# Altium PCB FT230.PcbDoc
Units mil, origin at the board's own origin, x right, y up, seen from the top; angles counter-clockwise.
Board outline not stored, 4 copper layers (Top Layer, Internal Plane 2, Internal Plane 1, Bottom Layer); 9 components, 0 nets, 43 pads, 14 vias.
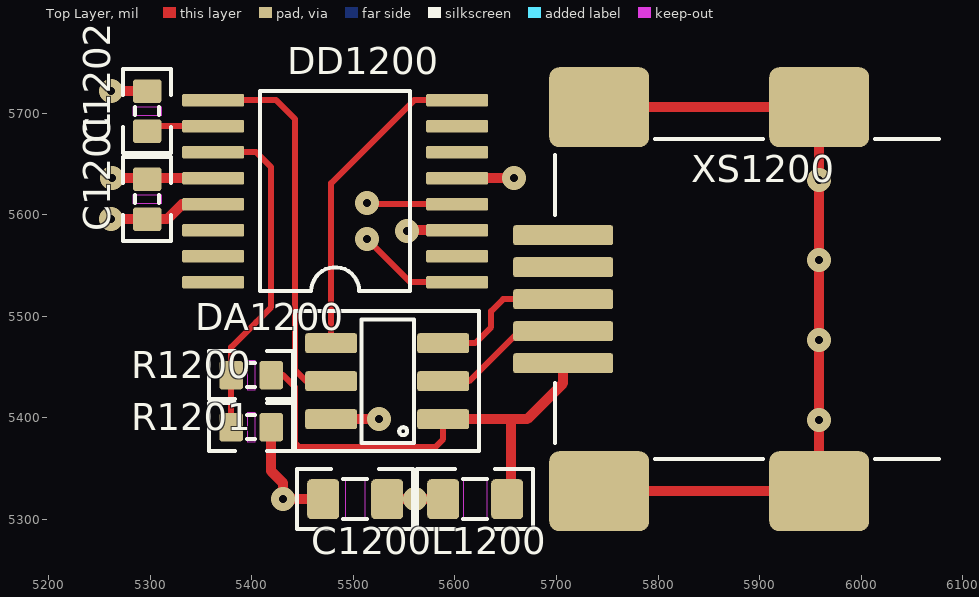
[diagram p0: Top Layer view]
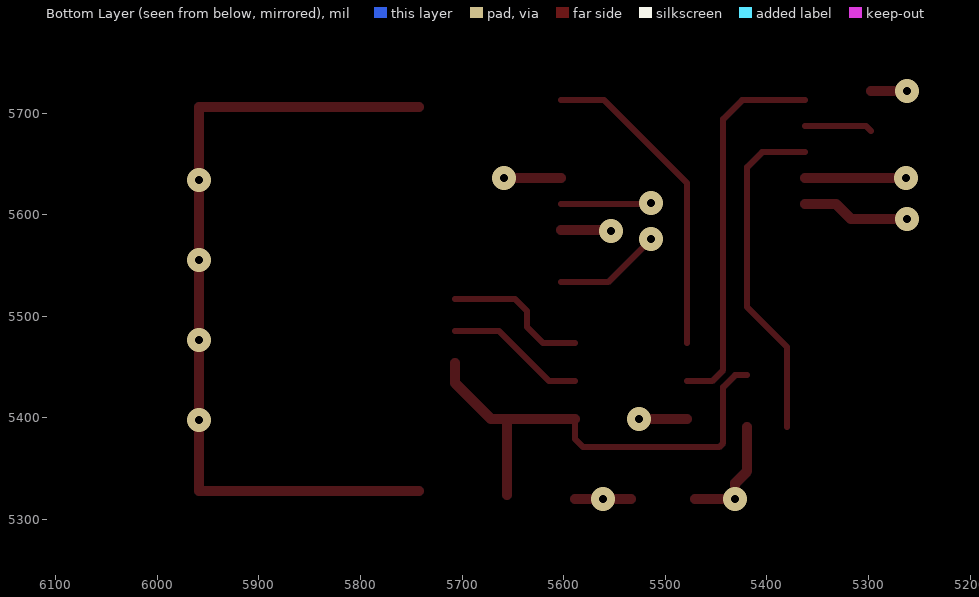
[diagram p1: Bottom Layer view, seen from below]
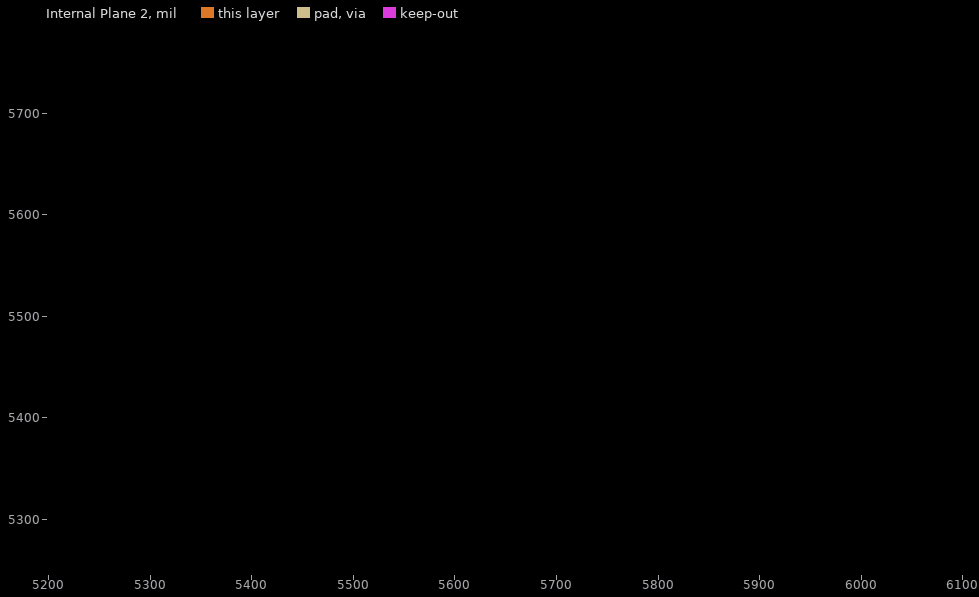
[diagram p2: Internal Plane 2, clearances drawn from the general rule]
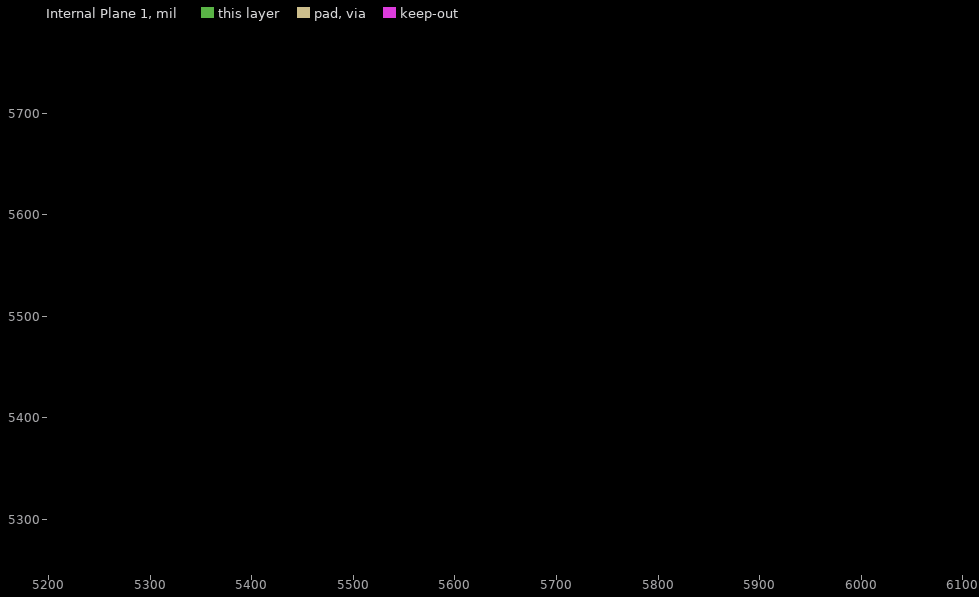
[diagram p3: Internal Plane 1, clearances drawn from the general rule]

## Layer stack, top to bottom
Top Solder: solder mask 0.4, Solder Resist, Dk 3.5
Top Layer: signal copper 1.4
Dielectric 1: dielectric 12.6, FR-4, Dk 4.8
Internal Plane 2: plane copper 1.4
Dielectric2: dielectric 12.6, FR-4, Dk 4.8
Internal Plane 1: plane copper 1.4
Dielectric3: dielectric 12.6, FR-4, Dk 4.8
Bottom Layer: signal copper 1.4
Bottom Solder: solder mask 0.4, Solder Resist, Dk 3.5

## Design rules (kind name [scope] priority, off if disabled: settings)
RoomDefinition "USB FTDI" [InComponentClass('Components Class 1')] p1: confinementstyle=ConfineIn formatcopy=TRUE lockcomponents=FALSE outline 5190.94,5241.14 6096.46,5241.14 6096.46,5792.32 5190.94,5792.32

## Components (designator, comment, footprint, x,y, rotation, side; value= is the part's Value field where it differs from the comment)
C1200 "4,7" CAP0603 5501.97,5319.88 r180 top
C1201 "0,1" CAP0402 5297.24,5615.16 r270 top
C1202 "0,1" CAP0402 5297.24,5701.77 r90 top
DA1200 "STF202-22T1G" SOT23-6 5592.52,5398.62 r180 top
DD1200 "FT230X" SSOP16-4.4 5482.28,5623.03 r180 top
L1200 "BLM18PG471" FB0603 5620.08,5319.88 r0 top
R1200 "4,7K" RES0402 5399.61,5441.93 r0 top
R1201 "10K" RES0402 5399.61,5390.75 r180 top
XS1200 "USB FTDI" USBmini 5742.13,5516.73 r90 top

## Footprints (in the part's own frame and the unit in brackets; to place one, negate y for a bottom-side part, rotate by r counter-clockwise, add the part's x,y. Pads: shape width x height; smd on the part's side, far side on the other; paste and mask are expansions set on the pad)
CAP0402 [mm]
  rrect25% 0.59x0.72 smd: 1(-0.5,0) 2(0.5,0)
  Top Layer keep-out region: -0.1,0.36 -0.1,-0.36 0.1,-0.36 0.1,0.36
  silkscreen extent -1.05,-0.6 1.05,0.6, body extent -0.5,-0.25 0.5,0.25, height 0.49
CAP0603 [mm]
  rrect25% 0.8x1 smd: 1(-0.8,0) 2(0.8,0)
  Top Layer keep-out region: -0.25,0.5 -0.25,-0.5 0.25,-0.5 0.25,0.5
  silkscreen extent -1.45,-0.75 1.45,0.75, body extent -0.8,-0.4 0.8,0.4, height 0.65
FB0603 [mm]
  rrect25% 0.8x1 smd: 1(-0.8,0) 2(0.8,0)
  Top Layer keep-out region: -0.3,0.5 -0.3,-0.5 0.3,-0.5 0.3,0.5
  silkscreen extent -1.45,-0.75 1.45,0.75, body extent -0.8,-0.4 0.8,0.4, height 0.65
RES0402 [mm]
  rrect25% 0.59x0.72 smd: 1(-0.5,0) 2(0.5,0)
  Top Layer keep-out region: -0.1,0.36 -0.1,-0.36 0.1,-0.36 0.1,0.36
  silkscreen extent -1.05,-0.6 1.05,0.6, body extent -0.5,-0.25 0.5,0.25, height 0.33
SOT23-6 [mm]
  rrect25% 1.3x0.5 smd mask+0.05: 1(0.1,0) 2(0.1,-0.95) 3(0.1,-1.9) 4(2.9,-1.9) 5(2.9,-0.95) 6(2.9,0)
  silkscreen extent -0.8,-2.7 3.8,0.8, body extent -0.02,-2.49 2.98,0.55, height 1.4
SSOP16-4.4 [mm]
  rrect25% 1.55x0.32 smd: 1(-3.05,2.275) 2(-3.05,1.625) 3(-3.05,0.975) 4(-3.05,0.325) 5(-3.05,-0.325) 6(-3.05,-0.975) 7(-3.05,-1.625) 8(-3.05,-2.275) 9(3.05,-2.275) 10(3.05,-1.625) 11(3.05,-0.975) 12(3.05,-0.325) 13(3.05,0.325) 14(3.05,0.975) 15(3.05,1.625) 16(3.05,2.275)
  silkscreen extent -1.88,-2.5 1.88,2.5, body extent -3.2,-2.5 3.2,2.5, height 1.1
USBmini [mm]
  rrect25% 2x2.5 smd: 0(-4.8,-5.5) 0(-4.8,0) 0(4.8,-5.5) 0(4.8,0)
  rrect25% 0.5x2.5 smd: 1(-1.6,0.9) 2(-0.8,0.9) 3(0,0.9) 4(0.8,0.9) 5(1.6,0.9)
  silkscreen extent -4,-8.5 4,1.1, body extent -4.83,-8.46 4.83,0.94, height 3.9

## Part data
C1200: library part CAP_0603, "Конденсатор чип"
C1201 C1202: library part CAP_0402, "Конденсатор чип"
DA1200: "Интерфейс USB защита+фильтр"
DD1200: "Интерфейс USB-UART"
L1200: library part BLM18PG, "Ферритовая бусина"
R1200 R1201: library part RES_0402, "Резистор чип"
XS1200: library part "USB mini", "Разъем USB"

## Via types
v1: diameter 23.62, hole 7.87, Top Layer to Bottom Layer, tented both sides, 14 vias

## Nets (pads, with @x,y where several pads share a name; then routed paths per layer and width w, separated by ;. In a path a pad name is that pad's centre, name@x,y a point inside that pad or via, vN(x,y) a via of type N, cw(c..) or ccw(c..) an arc to the next point about the centre after c; other vN are vias at no path point)
pads on no net: C1200.1 C1200.2 C1201.1 C1201.2 C1202.1 C1202.2 DA1200.1 DA1200.2 DA1200.3 DA1200.4 DA1200.5 DA1200.6 DD1200.1 DD1200.2 DD1200.3 DD1200.4 DD1200.5 DD1200.6 DD1200.7 DD1200.8 DD1200.9 DD1200.10 DD1200.11 DD1200.12 DD1200.13 DD1200.14 DD1200.15 DD1200.16 L1200.1 L1200.2 R1200.1 R1200.2 R1201.1 R1201.2 XS1200.0 XS1200.1 XS1200.2 XS1200.3 XS1200.4 XS1200.5
copper on no net: | length 3428.9
  Top Layer w5.91: 5297.24,5682.09 5302.17,5687.01 5362.2,5687.01 ; 5362.2,5661.42 5404.53,5661.42 5419.29,5646.65 5419.29,5508.86 5404.53,5494.09 5379.92,5469.49 5379.92,5390.75 ; 5362.2,5712.6 5424.21,5712.6 5442.91,5693.9 5442.91,5446.82 5453.71,5436.02 5478.35,5436.02 ; 5379.92,5441.93 5379.92,5447.31 ; 5419.29,5441.93 5431.1,5441.93 5442.91,5430.12 5442.91,5375 5446.85,5371.06 5580.71,5371.06 5588.58,5378.94 5588.58,5398.62 ; 5478.35,5473.43 5478.35,5630.91 5560.04,5712.6 5602.36,5712.6 ; v1(5513.78,5575.79) 5556.1,5533.46 5602.36,5533.46 ; v1(5513.78,5611.22) 5514.76,5610.24 5602.36,5610.24 ; 5588.58,5436.02 5614.17,5436.02 5663.39,5485.24 5706.69,5485.24 ; 5588.58,5473.43 5620.08,5473.43 5635.83,5489.17 5635.83,5504.92 5647.64,5516.73 5706.69,5516.73
  Top Layer w9.84: v1(5261.81,5595.47) 5297.24,5595.47 5316.93,5595.47 5331.69,5610.24 5362.2,5610.24 ; v1(5261.81,5721.46) 5297.24,5721.46 ; v1(5262.8,5635.83) 5362.2,5635.83 ; 5419.29,5390.75 5419.29,5347.44 5431.1,5335.63 v1(5431.1,5319.88) 5470.47,5319.88 ; 5478.35,5398.62 v1(5525.59,5398.62) ; 5533.46,5319.88 5588.58,5319.88 ; v1@5558.07,5584.65 5602.36,5584.65 ; 5588.58,5398.62 5655.51,5398.62 ; 5602.36,5635.83 v1(5658.46,5635.83) ; 5655.51,5323.82 5655.51,5398.62 ; 5706.69,5453.74 5706.69,5434.06 5671.26,5398.62 5655.51,5398.62 ; 5742.13,5327.76 5958.66,5327.76 5958.66,5705.71 5742.13,5705.71
  other v1: 5561.02,5319.88 5958.66,5397.64 5958.66,5476.38 5958.66,5555.12 5553.15,5583.66 5958.66,5633.86

## Other copper
Internal Plane 1 (plane layer: these items are gaps in the copper):
  lines w19.68: 5230.32,5280.51 5230.32,5752.95 6057.09,5752.95 6057.09,5280.51 5269.69,5280.51 5230.32,5280.51
Internal Plane 2 (plane layer: these items are gaps in the copper):
  lines w19.68: 5230.32,5280.51 5230.32,5752.95 6057.09,5752.95 6057.09,5280.51 5269.69,5280.51 5230.32,5280.51